# Altium PCB WS7.820.446.V01.PcbDoc
Units mm, origin at the board's own origin, x right, y up, seen from the top; angles counter-clockwise.
Board outline 102 x 24 mm, 4 copper layers (Top Layer, G2, S3, Bottom Layer); 62 components, 34 nets, 156 pads, 875 vias.
Unrouted connection lines stored in the file: 1595.
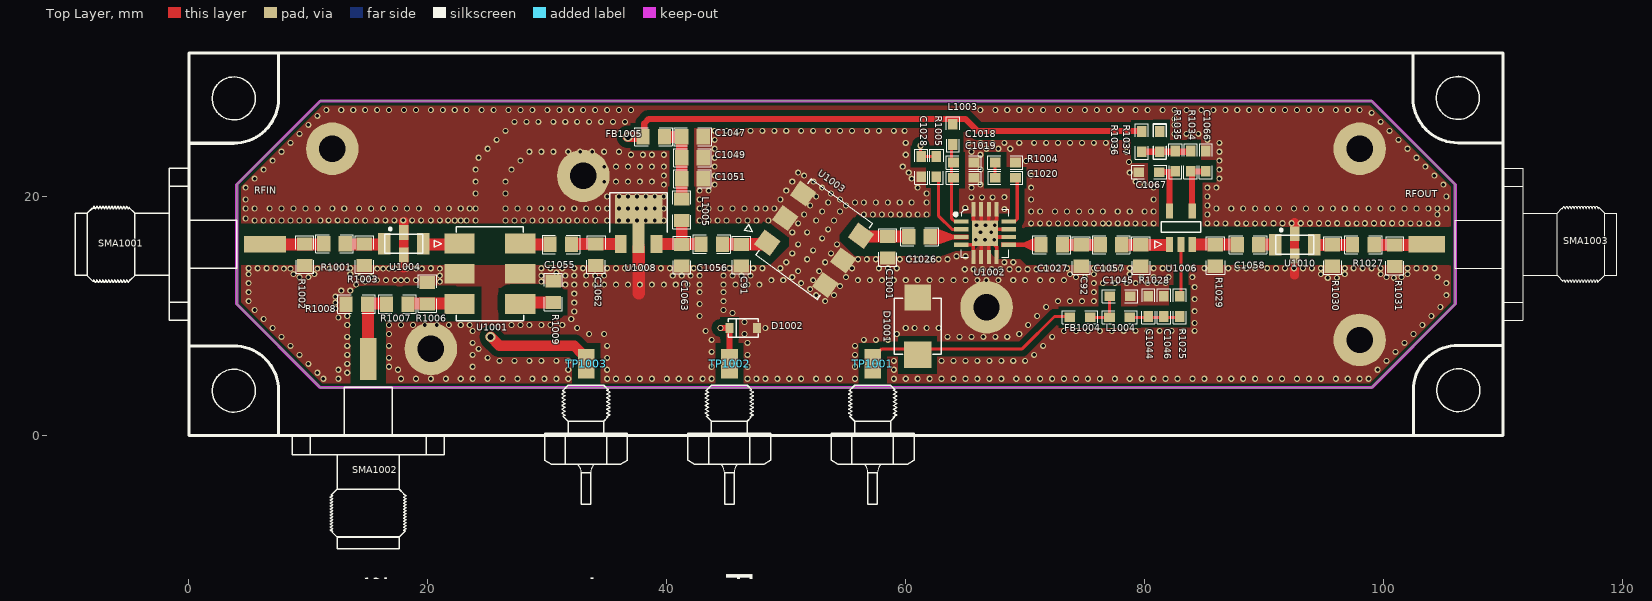
[diagram p0: Top Layer view]
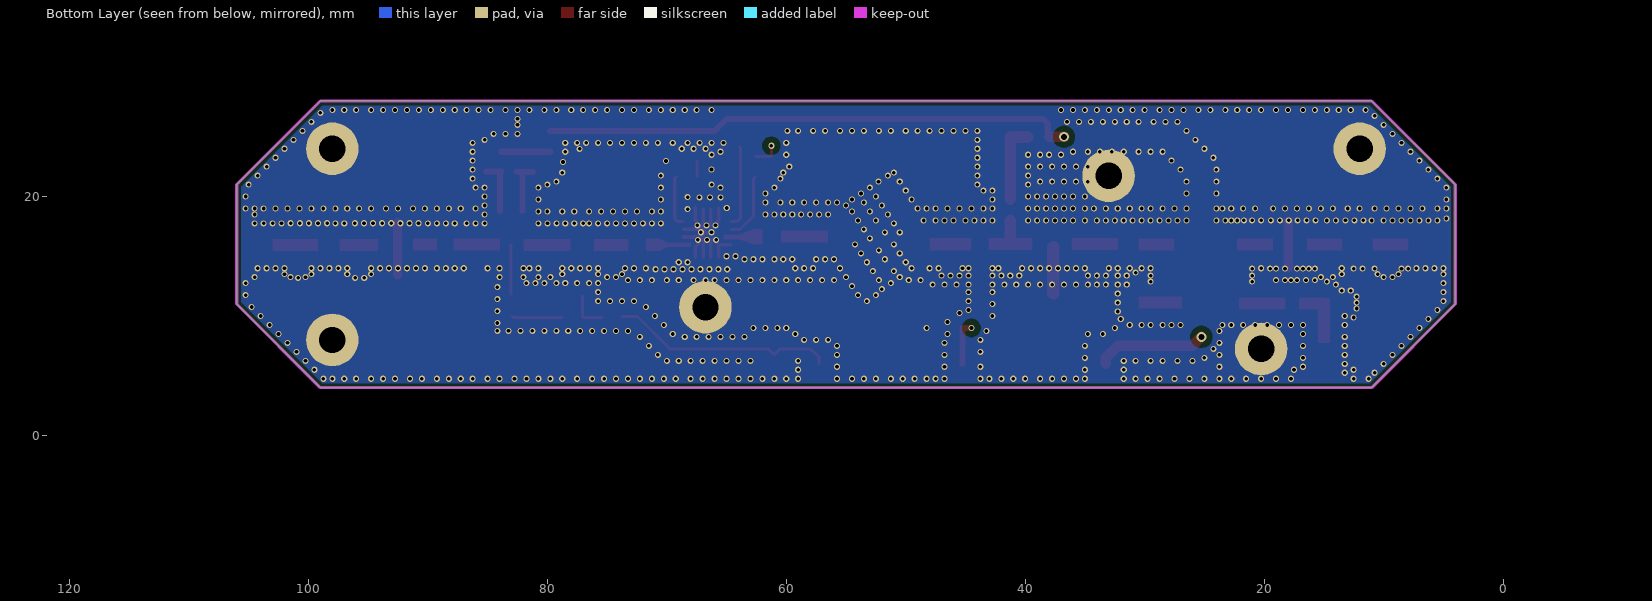
[diagram p1: Bottom Layer view, seen from below]
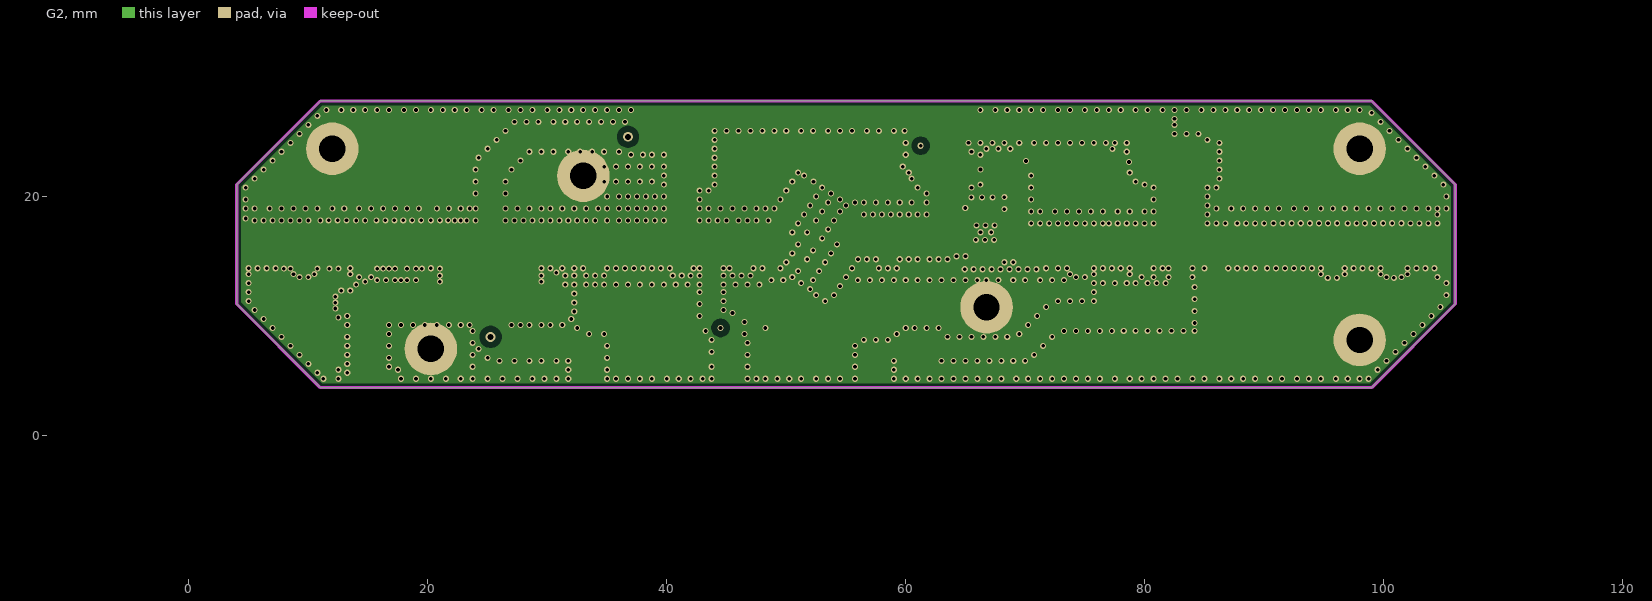
[diagram p2: G2]
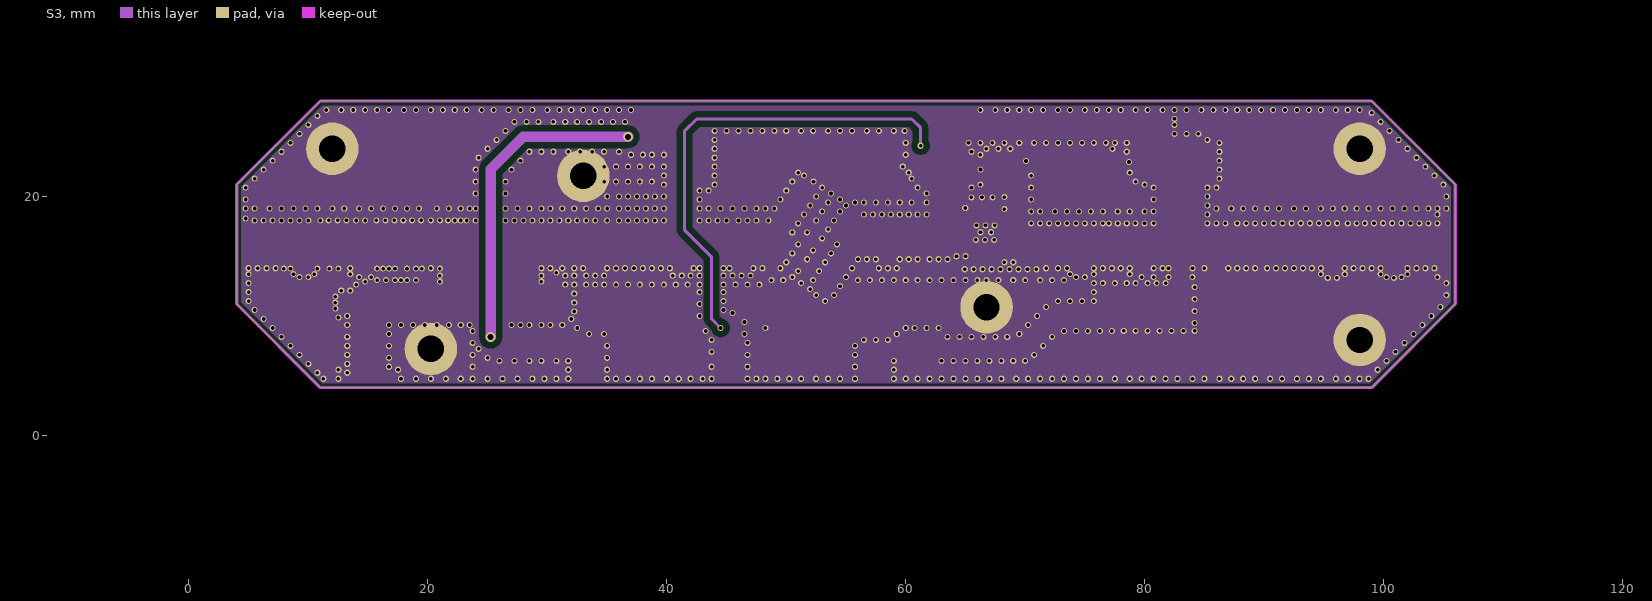
[diagram p3: S3]

## Layer stack, top to bottom
Top Solder: solder mask 0.0102, Solder Resist, Dk 3.5
Top Layer: signal copper 0.0356
Dielectric1: core 0.32, FR-4, Dk 4.8
G2: signal copper 0.0356
Dielectric3: prepreg 0.32, FR-4, Dk 4.8
S3: signal copper 0.0356
Dielectric2: core 0.32, FR-4, Dk 4.8
Bottom Layer: signal copper 0.0356
Bottom Solder: solder mask 0.0102, Solder Resist, Dk 3.5

## Board outline
4,11 11,4 99,4 106,11 106,21 99,28 11,28 4,21

## Design rules (kind name [scope] priority, off if disabled: settings)
Clearance Clearance_4 [(OnLayer('Keep-Out Layer'))] p1: gap=0.254 ignorepadtopadclearanceinfootprint=FALSE except(0: Arc-Hole Track-Hole SMDPad-Hole THPad-Hole Via-Hole Fill-Hole Poly-Hole Region-Hole Text-Hole)
Clearance Clearance_2 [IsFill or IsRegion vs (InPolygon)] p2: gap=1.016 ignorepadtopadclearanceinfootprint=FALSE except(0: Arc-Hole Track-Hole SMDPad-Hole THPad-Hole Via-Hole Fill-Hole Poly-Hole Region-Hole Text-Hole)
Clearance Clearance_1 [All vs (InPolygon)] p3: gap=0.508 ignorepadtopadclearanceinfootprint=FALSE except(0: Arc-Hole Track-Hole SMDPad-Hole THPad-Hole Via-Hole Fill-Hole Poly-Hole Region-Hole Text-Hole)
Clearance [All] p4: gap=0.152 ignorepadtopadclearanceinfootprint=FALSE except(0: Arc-Hole Track-Hole SMDPad-Hole THPad-Hole Via-Hole Fill-Hole Poly-Hole Region-Hole Text-Hole)
ComponentClearance [All] p1: gap=0 collisioncheckmode=3 verticalgap=0 showdistances=FALSE
DiffPairsRouting DP1DiffPairsRouting [InDifferentialPair ('D01') Or InDifferentialPair ('ADC_D1011') Or InDifferentialPair ('D1213') Or InDifferentialPair ('W5500_TX2') Or InDifferentialPair ('D67') Or InDifferentialPair ('ADC_D1213') Or InDifferentialPair ('D89') Or InDifferentialPair ('TX12') Or InDifferentialPair ('D1011') Or InDifferentialPair ('ADC_DCO') Or InDifferentialPair ('ADC_D89') Or InDifferentialPair ('D23') Or InDifferentialPair ('D45') Or InDifferentialPair ('ADC_D23') Or InDifferentialPair ('ADC_D67') Or InDifferentialPair ('ADC_D01') Or InDifferentialPair ('ADC_D45') Or InDifferentialPair ('W5500_RX2') Or InDifferentialPair ('RX') Or InDifferentialPair ('RX12') Or InDifferentialPair ('W5500_RX1') Or InDifferentialPair ('TX2') Or InDifferentialPair ('TX1') Or InDifferentialPair ('RX1') Or InDifferentialPair ('RX2') Or InDifferentialPair ('TX') Or InDifferentialPair ('W5500_TX1') Or InDifferentialPair ('DAC_IOUT') Or InDifferentialPair ('OUT') Or InDifferentialPair ('DCO') Or InDifferentialPair ('ADC_CLK') Or InDifferentialPair ('VIN')] p1: maxlimit=0.508 minlimit=0.216 mostfreqgap=0.216 toplayer_minwidth=0.191 toplayer_maxwidth=0.381 toplayer_prefwidth=0.191 midlayer1_minwidth=0.191 midlayer1_maxwidth=0.381 midlayer1_prefwidth=0.191 midlayer2_minwidth=0.191 midlayer2_maxwidth=0.381 midlayer2_prefwidth=0.191 bottomlayer_minwidth=0.191 bottomlayer_maxwidth=0.381 bottomlayer_prefwidth=0.191 maxuncoupledlength=12.7
HoleSize [All] p1: absolutevalues=TRUE maxlimit=10 minlimit=0.025 maxpercent=80.000 minpercent=20.000
HoleToHoleClearance [All] p1: gap=0 allowstackedmicrovias=TRUE
MatchedLengths DP1MatchedLengths [InDifferentialPair ('D01') Or InDifferentialPair ('ADC_D1011') Or InDifferentialPair ('D1213') Or InDifferentialPair ('W5500_TX2') Or InDifferentialPair ('D67') Or InDifferentialPair ('ADC_D1213') Or InDifferentialPair ('D89') Or InDifferentialPair ('TX12') Or InDifferentialPair ('D1011') Or InDifferentialPair ('ADC_DCO') Or InDifferentialPair ('ADC_D89') Or InDifferentialPair ('D23') Or InDifferentialPair ('D45') Or InDifferentialPair ('ADC_D23') Or InDifferentialPair ('ADC_D67') Or InDifferentialPair ('ADC_D01') Or InDifferentialPair ('ADC_D45') Or InDifferentialPair ('W5500_RX2') Or InDifferentialPair ('RX') Or InDifferentialPair ('RX12') Or InDifferentialPair ('W5500_RX1') Or InDifferentialPair ('TX2') Or InDifferentialPair ('TX1') Or InDifferentialPair ('RX1') Or InDifferentialPair ('RX2') Or InDifferentialPair ('TX') Or InDifferentialPair ('W5500_TX1') Or InDifferentialPair ('DAC_IOUT') Or InDifferentialPair ('OUT') Or InDifferentialPair ('DCO') Or InDifferentialPair ('ADC_CLK') Or InDifferentialPair ('VIN')] p1 off: tolerance=5.08 checknetsindiffpair=TRUE checkdiffpairvsdiffpair=FALSE checkxsignals=FALSE checkothers=FALSE
MinimumSolderMaskSliver [All] p1: minsoldermaskwidth=0
PlaneConnect [All] p1: planeconnectstyle=Direct reliefexpansion=0.508 reliefentries=4 reliefconductorwidth=0.508 reliefairgap=0.254
PolygonConnect [All] p1: connectstyle=Direct reliefconductorwidth=0.508 reliefentries=4 polygonreliefangle="45 Angle" airgapwidth=0.254
RoutingVias [All] p1: holewidth=0.305 width=0.508 viastyle="Through Hole" minholewidth=0.3 minwidth=0.508 maxholewidth=0.711 maxwidth=1.27
SilkToSilkClearance [All] p1: silktosilkclearance=0
SilkToSolderMaskClearance SilkscreenOverComponentPads [IsPad] p1: minsilkscreentomaskgap=0 clearancetoexposedcopper=TRUE
SolderMaskExpansion [All] p1: expansion=0 istentingtop=FALSE
Width DP1Width [InDifferentialPair('D01') Or InDifferentialPair('ADC_D1011') Or InDifferentialPair('D1213') Or InDifferentialPair('W5500_TX2') Or InDifferentialPair('D67') Or InDifferentialPair('ADC_D1213') Or InDifferentialPair('D89') Or InDifferentialPair('TX12') Or InDifferentialPair('D1011') Or InDifferentialPair('ADC_DCO') Or InDifferentialPair('ADC_D89') Or InDifferentialPair('D23') Or InDifferentialPair('D45') Or InDifferentialPair('ADC_D23') Or InDifferentialPair('ADC_D67') Or InDifferentialPair('ADC_D01') Or InDifferentialPair('ADC_D45') Or InDifferentialPair('W5500_RX2') Or InDifferentialPair('RX') Or InDifferentialPair('RX12') Or InDifferentialPair('W5500_RX1') Or InDifferentialPair('TX2') Or InDifferentialPair('TX1') Or InDifferentialPair('RX1') Or InDifferentialPair('RX2') Or InDifferentialPair('TX') Or InDifferentialPair('W5500_TX1') Or InDifferentialPair('DAC_IOUT') Or InDifferentialPair('OUT') Or InDifferentialPair('DCO') Or InDifferentialPair('ADC_CLK') Or InDifferentialPair('VIN')] p1: maxlimit=0.191 minlimit=0.191 preferedwidth=0.191
Width [All] p2: maxlimit=5.08 minlimit=0.191 preferedwidth=0.191
22 further rules are at their usual default settings.

## Components (designator, comment, footprint, x,y, rotation, side; value= is the part's Value field where it differs from the comment)
C91 "NC" C0805 46.25,15.1 r270 top
C92 "NC" C0805 74.688,15.061 r90 top
C1001 "NC" C0805 58.5,15.75 r270 top
C1018 "0.1uF" C0603#1 64.858,22.851 r0 top
C1019 "1nF" C0603#1 64.858,21.581 r180 top
C1020 "1nF" C0603#1 68.338,21.581 r180 top
C1026 "470pF" C0805 61.15,16.632 r0 top
C1027 "470pF" C0805 72.224,15.968 r0 top
C1028 "10pF" C0603#2 61.302,22.505 r270 top
C1044 "100pF" C0603#2 80.299,10.813 r90 top
C1045 "1nF" C0603#2 77.938,11.663 r0 top
C1046 "47nF" C0603#1 81.614,10.813 r270 top
C1047 "10uF/10V" C0805 42.15,25 r180 top
C1049 "0.1uF" C0805 42.15,23.25 r180 top
C1051 "15pF" C0805 42.15,21.5 r180 top
C1055 "470pF" C0805 31.134,15.993 r0 top
C1056 "470pF" C0805 43.75,16.025 r0 top
C1057 "470pF" C0805 77.188,15.961 r0 top
C1058 "470pF" C0805 88.653,15.961 r0 top
C1062 "NC" C0805 34.068,15.141 r90 top
C1063 "NC" C0805 41.25,15.1 r90 top
C1066 "47nF" C0603#1 85.112,22.962 r270 top
C1067 "47nF" C0603#1 80.365,22.052 r0 top
D1001 "SMBJ24CA" DO-214AA 61,9.15 r270 top
D1002 "ESD5V0D3B" SOD-323 46.4,9 r0 top
FB1004 "FB_0603" L0603 74.588,9.894 r0 top
FB1005 "FB_0805" L0805 38.9,25 r0 top
L1003 "FB_0603" L0603 63.938,25.211 r90 top
L1004 "10nH" L0603 77.905,9.894 r0 top
L1005 "22nH" L0805 41.25,18.9 r270 top
R1001 "5.1Ω" R0805 12.188,16.038 r0 top
R1002 "1KΩ" R0805 9.688,15.138 r90 top
R1003 "1KΩ" R0805 14.688,15.138 r90 top
R1004 "51Ω" R0603 68.338,22.851 r0 top
R1005 "30Ω" R0603 62.572,22.505 r270 top
R1006 "1KΩ" R0805 19.938,11.898 r270 top
R1007 "5.1Ω" R0805 17.438,10.998 r180 top
R1008 "1KΩ" R0805 14.038,10.998 r0 top
R1009 "51Ω" R0805 30.5,12.025 r90 top
R1025 "1K" R0603 82.938,10.813 r270 top
R1027 "5.1Ω" R0805 98.313,15.954 r0 top
R1028 "910Ω" R0805 79.688,15.061 r90 top
R1029 "910Ω" R0805 85.925,15.066 r90 top
R1030 "1KΩ" R0805 95.71,15.065 r90 top
R1031 "1KΩ" R0805 100.944,15.04 r90 top
R1034 "2K" R0603 83.842,22.962 r90 top
R1035 "2K" R0603 82.572,22.962 r270 top
R1036 "1K" R0603 79.75,24.6 r270 top
R1037 "1K" R0603 81.25,24.6 r270 top
SMA1001 "SMA-50KFD-4" SMA-50KFD-4#1 6.375,16.062 r180 top
SMA1002 "SMA-50KFD-4" SMA-50KFD-4#1 14.94,6.4 r270 top
SMA1003 "SMA-50KFD-4" SMA-50KFD-4#2 103.625,15.938 r0 top
TP1001 "TEST" FC-M4 57.25,6 r270 top
TP1002 "TEST" FC-M4 45.25,6 r270 top
TP1003 "TEST" FC-M4 33.25,6 r270 top
U1001 "ADC-6-13+" 6SM-2R54-7R87X5R59 25.188,13.538 r270 top
U1002 "RFSW6024" QFN16_0R65_4X4-1 66.636,16.933 r0 top
U1003 "RLM-63-2W+" 6SM-2R54-7R87X6R35 52.335,16.424 r54 top
U1004 "LFCN-400+" LFCN-3216 17.982,16.051 r0 top
U1006 "BAP70Q" SOT23-5 83.029,17.393 r0 top
U1008 "PHA-1+" SOT-89 37.643,17.475 r0 top
U1010 "LFCN-400+" LFCN-3216 92.558,15.954 r0 top

## Footprints (in the part's own frame and the unit in brackets; to place one, negate y for a bottom-side part, rotate by r counter-clockwise, add the part's x,y. Pads: shape width x height; smd on the part's side, far side on the other; paste and mask are expansions set on the pad)
6SM-2R54-7R87X5R59 [mm]
  rect 1.65x2.54 smd: 1(-2.54,-2.54) 2(0,-2.54) 3(2.54,-2.54) 4(2.54,2.54) 5(0,2.54) 6(-2.54,2.54)
  silkscreen extent -3.93,-4.66 3.93,2.82
6SM-2R54-7R87X6R35 [mm]
  rect 1.52x1.65 smd: 1(-2.54,3) 2(0,3) 3(2.54,3) 4(2.54,-3) 5(0,-3) 6(-2.54,-3)
  silkscreen extent -3.93,-3.18 3.93,5.16
C0603#1 [mm]
  rect 0.9x0.8 smd: 1(-0.85,0) 2(0.85,0)
  silkscreen extent -1.47,-0.55 1.47,0.55
C0603#2 [mm]
  rect 0.9x0.8 smd: 1(0.85,0) 2(-0.85,0)
  silkscreen extent -1.47,-0.55 1.47,0.55
C0805 [mm]
  rect 1.1x1.3 smd: 1(-0.9,0) 2(0.9,0)
  silkscreen extent -1.57,-0.76 1.57,0.76
DO-214AA [mm]
  rect 2.2x2.2 smd: 1(-2.4,0)
  rect 2.2x2.3 smd: 2(2.4,0)
  silkscreen extent -2.35,-1.97 2.35,1.97
FC-M4 [mm] "一对"
  rect 2.5x1.4 smd: 1(0,0)
  silkscreen extent 1.8,-3.48 11.77,3.44
L0603 [mm]
  rect 0.9x0.8 smd: 1(0.85,0) 2(-0.85,0)
  silkscreen extent -1.47,-0.55 1.47,0.55
L0805 [mm]
  rect 1.1x1.3 smd: 1(-0.9,0) 2(0.9,0)
  silkscreen extent -1.57,-0.76 1.57,0.76
LFCN-3216 [mm]
  rect 1.04x1.8 smd mask+0.05: 1(-1.625,0) 3(1.625,0)
  rect 0.81x1.25 smd mask+0.05: 2(0,-0.93) 4(0,0.93)
  silkscreen extent -1.6,-0.8 1.6,1.34
QFN16_0R65_4X4-1 [mm]
  rect 1.2x0.35 smd: 1(-2,0.975) 2(-2,0.325) 3(-2,-0.325) 4(-2,-0.975) 9(2,-0.975) 10(2,-0.325) 11(2,0.325) 12(2,0.975)
  rect 0.35x1.2 smd: 5(-0.975,-2) 6(-0.325,-2) 7(0.325,-2) 8(0.975,-2) 13(0.975,2) 14(0.325,2) 15(-0.325,2) 16(-0.975,2)
  rect 2.15x2.15 smd: 17(0,0)
  silkscreen extent -2.58,-2 2,2
R0603 [mm]
  rect 0.9x0.8 smd: 1(-0.85,0) 2(0.85,0)
  silkscreen extent -1.47,-0.55 1.47,0.55
R0805 [mm]
  rect 1.1x1.3 smd: 1(-0.9,0) 2(0.9,0)
  silkscreen extent -1.57,-0.76 1.57,0.76
SMA-50KFD-4#1 [mm] "SMA-JB3C"
  rect 3.5x1.4 smd: 1(0,0.06)
  silkscreen extent 2.37,-6.29 15.9,6.41
SMA-50KFD-4#2 [mm] "SMA-JB3C"
  rect 3.048x1.4 smd: 1(0,0.06)
  silkscreen extent 2.37,-6.29 15.9,6.41
SOD-323 [mm]
  rect 0.65x0.85 smd: 1(-1.15,0) 2(1.15,0)
  silkscreen extent -1.25,-0.76 1.27,0.76
SOT23-5 [mm]
  rect 0.6x1.27 smd: 1(-0.95,-1.4) 2(0,-1.4) 3(0.95,-1.4) 4(0.95,1.4) 5(-0.95,1.4)
  silkscreen extent -2.2,-1.7 1.65,0.5
SOT-89 [mm]
  rect 1x1.5 smd: 1(-1.5,-1.45) 3(1.5,-1.45)
  rect 1x4 smd: 2(0,-0.2)
  rect 4x2.4 smd: 4(0,1.45)
  silkscreen extent -2.4,-0.45 2.4,2.85

## Part data
C91 C92 C1001 C1026 C1027: library part 10pF贴片电容, "贴片电容_GRM215C1H100JA01D_10pF±5%,50V,0805", code=01010097
C1018: library part 0.1uF贴片电容, "贴片电容_GRM188R71H104KA01D_0.1uF±10%,50V,0603", code=01010045
C1019 C1020: library part 1000pF贴片电容, "贴片电容_GRM188R71H102KA01_1000pF±10%,50V,0603", code=01010093
C1028: library part 10pF贴片电容, "贴片电容_0603CG100J500NT_10pF±5%,50V,0603", code=01010001
C1044 C1045: library part 100pF贴片电容, "贴片电容_GRM185C1H101K_100pF±10%,50V,0603"
C1046 C1066 C1067: library part 47nF贴片电容, "贴片电容_GRM1885C1H473KA01D_47nF±10 %,50V,0603", code=01010080
C1047: library part 10uF贴片电容, "贴片电容_GRM21BR61A106KE19L_10uF±10%,10V,0805", code=01010036
C1049: library part 100nF贴片电容, "贴片电容_GRM21BR71E104KA01L_100nF±10%,25V,0805", code=03030016
C1051: library part 15pF贴片电容, "贴片电容_GRM2165C1H150JA01D_15pF±5%,50V,0805", code=01010024
C1055: library part 1pF贴片电容, "贴片电容_GRM2165C1H1R0CA01D_1pF±0.25F,50V,0805"
C1056: library part 3pF贴片电容, "贴片电容_GRM2165C1H3R0DD47D_3pF±0.5pF%,50V,0805"
C1057 C1058: library part 100pF贴片电容, "贴片电容_GRM2165C1H101JA01D_100pF±5%,50V,0805"
C1062 C1063: library part DLC_0.5pF, "普通电容"
D1001: library part SMBJ12CA, "TVS_SMBJ24CA_SMB封装"
D1002: library part ESD5B5.0ST1G, "ESD_ESD5V0D3B_SOD-323,5V,双管"
FB1004: library part 0603贴片磁珠, "贴片磁珠_100R,0603", code=0103016
FB1005: library part 0805贴片磁珠, "贴片磁珠_600R,0805", code=01030023
L1003: library part 0805贴片磁珠
L1004: library part 3.3nH贴片电感, "贴片电感_3.3nH,0603"
L1005: library part 22nH贴片电感, "贴片电感_22nH,0805", code=01030016
R1001 R1007 R1027: library part 18Ω贴片电阻, "贴片电阻_0805,5.1Ω,±1％", code=1.02.01.131
R1002 R1003 R1006 R1008 R1030 R1031: library part 300Ω贴片电阻, "贴片电阻_0805,1KΩ,±5％", code=1.02.01.108
R1004: library part 51Ω贴片电阻, "贴片电阻_51Ω±5%,0603", code=01020009
R1005: library part 30Ω贴片电阻, "贴片电阻_30Ω±5%,0603", code=01020108
R1009: library part 51Ω贴片电阻, "贴片电阻_51Ω±5%,0805", code=01020023
R1025 R1036 R1037: library part 1K贴片电阻, "贴片电阻_1K±5%,0603", code=01020082
R1028 R1029: library part 910Ω贴片电阻, "贴片电阻_910Ω±5%,0805", code=01020061
R1034 R1035: library part 2K贴片电阻, "贴片电阻_2K±5%,0603", code=01020086
SMA1001 SMA1002 SMA1003: "射频同轴连接器_SMA-50KFD-4", code=03100009
TP1001 TP1002 TP1003: library part TP1mm, "表贴测试点1mm"
U1001: library part ADC-6-1R+, "50Ω,5 to200MHz"
U1002: library part RFSW6124, maker=RFMD
U1003: "50Ω,30 to6000MHz"
U1004 U1010: library part LFCN-2500+, "滤波器_LFCN-2500+_DC~2500MHz,3216", code=0306016
U1006: "二极管衰减器_BAP70Q_300kHz ~4GHz,SOT753", code=03020009, maker=NXP
U1008: "功率放大管_PHA-1+_0.05-6GHz,SOT89", code=01060123, maker=Minicircuits

## Free pads (board coordinates)
  round 4.4 hole 2.2: ""(12,24) ""(20.25,7.25) ""(33.015,21.736) ""(66.765,10.736) ""(98,8) ""(98,24)

## Via types
v1: diameter 0.508, hole 0.305, Top Layer to Bottom Layer, tented both sides, 803 vias
v2: diameter 0.508, hole 0.3, Top Layer to Bottom Layer, tented both sides, 70 vias
v3: diameter 0.813, hole 0.508, Top Layer to Bottom Layer, tented both sides, 2 vias

## Nets (pads, with @x,y where several pads share a name; then routed paths per layer and width w, separated by ;. In a path a pad name is that pad's centre, name@x,y a point inside that pad or via, vN(x,y) a via of type N, cw(c..) or ccw(c..) an arc to the next point about the centre after c; other vN are vias at no path point)
+5V_1: FB1005.1 L1003.1 R1036.1 TP1003.1 | length 80.3
  Top Layer w0.508: FB1005.1@38,25.25 38.114,25.364 38.114,26.114 38.5,26.5 65,26.5 66,25.5 R1036.1@79.787,25.5
  Top Layer w0.889: v3(25.25,8.25) 26,7.5 32.245,7.5 32.939,6.806 32.995,6.806 33.25,6.55 TP1003.1 ; v3(36.75,25) FB1005.1
  S3 w0.889: v3(25.25,8.25) 25.25,22.273 27.977,25 v3(36.75,25)
BAP70Q_Vctrl_1: D1001.2 FB1004.2 TP1001.1 | length 18.9
  Top Layer w0.254: TP1001.1 57.25,6.55 57.823,7.123 57.873,7.123 58,7.25 60.5,7.25 D1001.2 61.5,7.25 69.75,7.25 72.461,9.961 FB1004.2@73.738,9.961
GND: C91.2 C92.1 C1001.2 C1018.2 C1019.1 C1028.1 C1044.1 C1045.1 C1046.1 C1047.1 C1049.1 C1051.1 C1062.1 C1063.1 C1066.1 C1067.1 D1001.1 D1002.2 pad. R1002.1 R1003.1 R1004.2 R1006.1 R1008.1 R1009.2 R1028.1 R1029.1 R1030.1 R1031.1 U1001.2 U1001.5 U1002.4 U1002.5 U1002.6 U1002.7 U1002.8 U1002.10 U1002.11 U1002.13 U1002.14 U1002.15 U1002.16 U1002.17 U1003.2 U1003.3 U1003.5 U1003.6 U1004.2 U1004.4 U1008.2 U1008.4 U1010.2 U1010.4 | length 31.2
  Top Layer w0.191: v1(75,17.75) 75.098,17.848 v1@75.048,17.898
  Top Layer w0.305: U1002.4 U1002.17@65.661,15.958 ; U1002.5 U1002.17@65.661,15.958 ; U1002.16@65.661,19.021 65.661,18.034 65.714,17.982 65.714,17.856 65.722,17.848 U1002.17@65.791,17.848 ; v1(65.874,16.374) U1002.17@65.874,16.171 ; U1002.6 U1002.17@66.311,16.324 ; U1002.17@66.311,17.543 U1002.15 ; U1002.17 U1002.17@66.961,17.258 ; U1002.7 U1002.17@66.961,16.374 ; U1002.14 U1002.17@66.961,17.258 ; U1002.17@67.246,16.608 U1002.10 ; U1002.17@67.246,17.258 U1002.11 ; U1002.17@67.315,16.07 67.611,15.774 U1002.8 ; v1(67.398,16.374) U1002.17@66.961,16.374 ; U1002.13@67.611,19.119 67.611,18.034 67.559,17.982 67.559,17.856 U1002.17@66.961,17.258 ; U1002.17@65.661,15.958 U1002.17@65.874,16.171 ; U1002.17@65.874,16.171 66.077,16.374 v1(66.636,16.374) U1002.17@66.961,16.374 ; U1002.17@66.961,16.374 U1002.17@66.961,17.258
  Top Layer w0.762: 17.982,14.019 U1004.2 U1004.4 v2@17.982,17.908 ; U1010.2@92.534,15 U1010.2 ; 92.558,13.442 U1010.2 ; 92.558,17.812 U1010.4 U1010.2
  Top Layer w1.016: 37.651,11.901 U1008.2@37.651,15.783
  other v1: 11.25,4.75 12.5,4.75 17.75,4.75 19,4.75 20.25,4.75 21.5,4.75 22.75,4.75 23.75,4.75 25,4.75 26.25,4.75 27.5,4.75 28.75,4.75 29.75,4.75 30.75,4.75 31.75,4.75 35,4.75 35.75,4.75 36.75,4.75 37.75,4.75 38.75,4.75 40,4.75 41,4.75 42,4.75 43,4.75 43.75,4.75 46.75,4.75 47.5,4.75 48.25,4.75 49.25,4.75 50.25,4.75 51.25,4.75 52.5,4.75 53.5,4.75 54.5,4.75 55.75,4.75 59,4.75 60,4.75 61,4.75 62,4.75 63,4.75 64,4.75 65,4.75 66,4.75 67,4.75 68,4.75 69.25,4.75 70.25,4.75 71.25,4.75 72.25,4.75 73.25,4.75 74.25,4.75 75.25,4.75 76.25,4.75 77.5,4.75 78.75,4.75 79.75,4.75 80.75,4.75 81.75,4.75 82.75,4.75 84,4.75 85,4.75 86.25,4.75 87.25,4.75 88.25,4.75 89.25,4.75 90.5,4.75 91.5,4.75 92.75,4.75 93.75,4.75 94.75,4.75 96,4.75 97,4.75 98,4.75 98.75,4.75 10.75,5.25 13.25,5.25 12.5,5.5 17.5,5.5 31.75,5.5 35,5.5 59,5.5 99.5,5.5 16.75,5.75 23.75,5.75 43.75,5.75 46.75,5.75 55.75,5.75 10,6 13.25,6 26,6.25 27.25,6.25 28.5,6.25 29.5,6.25 30.75,6.25 31.75,6.25 59,6.25 63,6.25 64,6.25 65,6.25 66,6.25 67,6.25 68,6.25 69,6.25 70,6.25 100.25,6.25 16.75,6.5 25,6.5 35,6.5 9.25,6.75 13.25,6.75 23.75,6.75 46.75,6.75 55.75,6.75 70.75,6.75 43.75,7 101,7 24.25,7.25 8.5,7.5 13.25,7.5 16.75,7.5 35,7.5 55.75,7.5 71.5,7.5 23.75,7.75 46.75,7.75 101.75,7.75 43.75,8 56.5,8 57.5,8 58.5,8 7.75,8.25 13.25,8.25 63.5,8.25 64.5,8.25 65.5,8.25 66.5,8.25 67.5,8.25 68.5,8.25 72.25,8.25 16.75,8.5 33.5,8.5 34.75,8.5 46.5,8.5 59.25,8.5 69.5,8.5 102.5,8.5 23.75,8.75 43.25,8.75 73.25,8.75 74.25,8.75 75.25,8.75 76.25,8.75 77.25,8.75 7,9 32.5,9 48.25,9 60,9 60.75,9 61.75,9 62.75,9 13.25,9.25 16.75,9.25 17.75,9.25 18.75,9.25 19.75,9.25 20.75,9.25 21.75,9.25 22.75,9.25 23.5,9.25 27,9.25 27.75,9.25 28.5,9.25 29.5,9.25 30.25,9.25 31.25,9.25 70.25,9.25 103.25,9.25 46.5,9.5 6.25,9.75 32,9.75 12.5,9.875 13.25,10 42.75,10 71,10 104,10 45.5,10.25 32.25,10.375 5.5,10.5 44.75,10.5 12.25,10.625 71.75,10.75 104.75,10.75 42.75,11 12.25,11.125 32.25,11.125 5,11.25 44.75,11.25 53.25,11.25 72.75,11.25 73.75,11.25 74.75,11.25 75.75,11.25 12.25,11.625 52.5,11.75 54,11.75 105.25,11.75 32.25,11.875 5,12 42.75,12 44.75,12 75.75,12 12.75,12.125 13.5,12.125 52,12.25 54.5,12.5 14,12.625 31.5,12.625 32.25,12.625 33.25,12.625 34,12.625 34.75,12.625 35.75,12.625 39.75,12.625 40.75,12.625 41.75,12.625 42.75,12.625 44.75,12.625 45.75,12.625 46.75,12.625 47.75,12.625 5,12.75 51.25,12.75 75.75,12.75 105.25,12.75 14.75,12.875 21,12.875 29.5,12.875 15.75,13 16.5,13 17.25,13 17.75,13 18.25,13 19,13 48.75,13 49.75,13 52.25,13 59,13 60,13 61,13 62,13 63,13 64,13 95.325,13.199 96.087,13.199 100.858,13.199 9.25,13.25 10,13.25 14.25,13.25 15.25,13.25 50.5,13.25 55,13.25 75,13.25 79.75,13.25 80.75,13.25 100.25,13.25 101.5,13.25 104.5,13.25 21,13.375 29.5,13.375 31.5,13.375 32.25,13.375 34.75,13.375 40.5,13.375 41.25,13.375 42,13.375 42.75,13.375 44.75,13.375 45.5,13.375 46.25,13.375 47,13.375 5,13.5 8.75,13.5 10.5,13.5 13.5,13.5 73.75,13.5 78.75,13.5 94.75,13.5 96.75,13.5 99.75,13.5 102,13.5 30.75,13.625 51,13.75 52.75,13.75 64.938,13.913 65.688,13.913 66.438,13.913 67.188,13.913 67.938,13.913 68.688,13.913 69.438,13.913 70.188,13.913 70.938,13.913 10.75,13.963 11.75,13.963 12.5,13.963 15.75,13.963 16.25,13.963 16.75,13.963 17.25,13.963 18.25,13.963 19,13.963 19.5,13.963 21,13.963 13.5,14 20.25,14 29.5,14 30.25,14 31.25,14 32.25,14 36.5,14 37.25,14 38,14 38.75,14 39.5,14 40.25,14 42.25,14 42.75,14 44.75,14 45.25,14 47.25,14 48,14 49.5,14 55.5,14 57.75,14 58.5,14 59.25,14 71.75,14 72.75,14 73.5,14 76.5,14 77.25,14 78,14 78.75,14 80.75,14 81.5,14 82,14 84,14 85,14 87,14 87.75,14 88.5,14 89.25,14 90.25,14 91,14 91.75,14 92.5,14 93.25,14 94,14 94.75,14 96.75,14 97.5,14 98.25,14 99,14 99.75,14 102,14 102.75,14 103.5,14 104.25,14 50,14.5 53.25,14.5 51.75,14.75 56,14.75 56.75,14.75 57.5,14.75 59.5,14.75 60.25,14.75 61,14.75 62,14.75 62.75,14.75 63.5,14.75 64.25,15 65,15 50.5,15.25 53.75,15.25 52.25,15.5 51,16 54.25,16 53,16.5 50.5,17 51.75,17 66.255,17.009 67.144,17.009 53.5,17.25 65.918,17.594 66.68,17.594 67.442,17.594 51,17.75 70.5,17.75 71.25,17.75 72,17.75 72.75,17.75 73.5,17.75 74.25,17.75 75.75,17.75 77,17.75 77.75,17.75 78.5,17.75 79.226,17.75 79.988,17.75 80.75,17.75 85.25,17.75 86,17.75 86.75,17.75 87.75,17.75 88.5,17.75 89.25,17.75 90,17.75 90.78,17.762 91.542,17.762 92.304,17.762 93.066,17.762 93.828,17.762 94.59,17.762 95.352,17.762 96.114,17.762 98.437,17.762 99.198,17.762 99.96,17.762 100.722,17.762 101.484,17.762 102.25,17.75 103,17.75 103.75,17.75 104.5,17.75 5.5,18 6.25,18 7,18 7.75,18 8.5,18 9.25,18 10,18 11,18 14,18 14.75,18 22.25,18 22.75,18 23.25,18 24,18 26.5,18 27.25,18 28,18 28.75,18 29.5,18 30.25,18 31,18 31.75,18 32.5,18 33.25,18 34,18 35,18 36,18 36.75,18 37.5,18 38.25,18 39,18 39.75,18 42.75,18 43.5,18 44.25,18 45,18 46,18 46.75,18 47.5,18 48.5,18 52.5,18 54,18 4.75,18.163 51.5,18.5 56.5,18.5 57.25,18.5 58,18.5 58.75,18.5 59.5,18.5 60.25,18.5 61,18.5 61.75,18.5 85.25,18.5 104.5,18.5 53,18.75 54.5,18.75 70.5,18.75 71.25,18.75 72.5,18.75 73.5,18.75 74.5,18.75 75.5,18.75 76.5,18.75 77.75,18.75 78.75,18.75 80,18.75 80.75,18.75 68.256,18.94 4.75,19 5.5,19 6.75,19 7.75,19 8.75,19 9.75,19 10.75,19 12,19 13,19 14.25,19 15.25,19 16.25,19 17.25,19 18.25,19 19.25,19 20.75,19 21.75,19 22.75,19 23.5,19 24,19 26.5,19 27.5,19 28.5,19 29.5,19 30.25,19 31.25,19 33.25,19 34.25,19 35,19 36,19 36.75,19 37.5,19 38.25,19 39,19 39.75,19 42.75,19 43.5,19 44.5,19 45.5,19 46.5,19 47.5,19 48.25,19 49,19 86,19 87.25,19 88.25,19 89.25,19 90.25,19 91.25,19 92.5,19 93.5,19 94.75,19 95.75,19 96.75,19 97.75,19 98.75,19 99.75,19 100.75,19 101.75,19 102.75,19 103.75,19 104.5,19 105.25,19 64.985,19.041 52,19.25 55,19.25 85.25,19.25 53.5,19.5 55.75,19.5 56.5,19.5 57.5,19.5 58.5,19.5 59.5,19.5 60.5,19.5 61.75,19.5 4.75,19.75 42.75,19.75 49.5,19.75 54.5,19.75 70.5,19.75 80.75,19.75 65.493,19.93 66.382,19.93 67.271,19.93 68.256,19.956 35,20 36,20 36.75,20 37.5,20 38.25,20 39,20 39.75,20 52.5,20 85.25,20 105.25,20 24,20.25 26.5,20.25 53.75,20.25 61.75,20.25 42.75,20.5 43.5,20.5 50,20.5 4.75,20.75 53,20.75 61,20.75 65.5,20.75 70.5,20.75 80.75,20.75 85.25,20.75 86,20.75 39.75,21 44,21 66.25,21 80,21 105,21 24,21.25 26.5,21.25 34.75,21.25 35.75,21.25 36.75,21.25 37.75,21.25 38.75,21.25 50.5,21.25 52.284,21.253 79.25,21.25 5.5,21.5 60.5,21.5 39.75,21.75 44,21.75 51.5,21.75 70.5,21.75 104.25,21.75 51,22 60.25,22 78.75,22 6.25,22.25 24,22.25 27,22.25 66.255,22.258 34.75,22.5 35.75,22.5 36.75,22.5 37.75,22.5 38.75,22.5 39.75,22.5 44,22.5 59.75,22.5 103.5,22.5 78.692,22.894 70.065,22.978 7,23 27.75,23 24.25,23.25 44,23.25 102.75,23.25 37,23.5 38,23.5 38.75,23.5 39.75,23.5 60,23.5 66.25,23.5 7.75,23.75 28.5,23.75 29.5,23.75 30.5,23.75 31.75,23.75 32.75,23.75 33.75,23.75 34.75,23.75 36,23.75 65.5,23.75 78.5,23.75 86.25,23.75 25,24 44,24 66.75,24 67.75,24 68.75,24 77.295,23.994 102,24 8.5,24.5 60,24.5 65.25,24.5 66.25,24.5 67.25,24.5 68.25,24.5 69.5,24.5 70.75,24.5 71.75,24.5 72.75,24.5 73.75,24.5 74.75,24.5 75.75,24.5 76.75,24.5 77.5,24.5 78.5,24.5 86.25,24.5 25.75,24.75 44,24.75 85.25,24.75 101.25,24.75 9.25,25.25 82.5,25.25 83.5,25.25 84.5,25.25 26.5,25.5 44,25.5 45,25.5 46,25.5 47,25.5 48,25.5 49,25.5 50,25.5 51.25,25.5 52.25,25.5 53.5,25.5 54.5,25.5 55.5,25.5 56.75,25.5 57.75,25.5 59,25.5 59.905,25.5 100.5,25.5 10,26 82.5,26 27.25,26.25 28.25,26.25 29.25,26.25 30.5,26.25 31.5,26.25 32.5,26.25 33.5,26.25 34.5,26.25 35.5,26.25 36.5,26.25 99.75,26.25 82.5,26.5 10.75,26.75 99,27 11.5,27.25 12.75,27.25 13.75,27.25 14.75,27.25 15.75,27.25 16.75,27.25 18,27.25 19,27.25 20.25,27.25 21.25,27.25 22.25,27.25 23.25,27.25 24.5,27.25 25.5,27.25 26.75,27.25 27.75,27.25 28.75,27.25 30,27.25 31,27.25 32,27.25 33,27.25 34,27.25 35,27.25 36,27.25 37,27.25 66.25,27.25 67.5,27.25 68.5,27.25 69.5,27.25 70.5,27.25 71.5,27.25 72.75,27.25 73.75,27.25 75,27.25 76,27.25 77,27.25 78,27.25 79.25,27.25 80.25,27.25 81.5,27.25 82.5,27.25 83.5,27.25 84.75,27.25 85.75,27.25 86.75,27.25 87.75,27.25 88.75,27.25 89.75,27.25 90.75,27.25 91.75,27.25 92.75,27.25 93.75,27.25 94.75,27.25 96,27.25 97,27.25 98,27.25
  other v2: 78.25,8.75 79.25,8.75 80.25,8.75 81.25,8.75 82.25,8.75 83.25,8.75 84.188,8.75 84.188,9.413 84.188,10.413 84.188,11.413 84.188,12.413 36.75,12.625 37.75,12.625 38.75,12.625 76.5,12.75 77.5,12.75 78.5,12.75 79.25,12.75 80.25,12.75 81,12.75 81.75,12.75 56,13 57,13 58,13 65,13 66,13 66.75,13 67.75,13 69,13 70,13 71.25,13 72.25,13 73.25,13 74.25,13.25 82,13.25 84,13.25 33.25,13.375 34,13.375 75.75,13.5 7.938,13.963 8.5,13.963 5,14 5.75,14 6.5,14 7.25,14 33,14 35,14 35.75,14 75.75,14 68.25,14.5 69,14.5 76.5,17.75 97,17.75 97.75,17.75 11.688,18 12.438,18 13.188,18 15.688,18 16.438,18 17.188,18 17.938,18 18.688,18 19.438,18 20.25,18 21,18 21.688,18 32.25,19 86.25,21.5 86.25,22.25 86.25,23
NetC91_1: C91.1 C1056.2 U1003.1
NetC92_2: C92.2 C1027.2 C1057.1
NetC1001_1: C1001.1 C1026.1 U1003.4
NetC1018_1: C1018.1 C1019.2 L1003.2 U1002.1 | length 8.1
  Top Layer w0.254: 63.847,20.422 63.847,19.27 ; L1003.2@63.935,24.16 63.847,24.073 63.847,19.27 ; U1002.1 64.086,17.908 63.847,18.147 63.847,19.27
NetC1020_1: C1020.1 U1002.12 | length 4.4
  Top Layer w0.254: U1002.12 69.129,17.908 69.334,18.113 69.334,21.536 C1020.1@69.188,21.683
NetC1020_2: C1020.2 R1004.1 | length 1.3
  Top Layer w0.254: C1020.2@67.488,21.683 R1004.1@67.488,22.953
NetC1026_2: C1026.2 U1002.3
NetC1027_1: C1027.1 U1002.9
NetC1044_2: C1044.2 C1046.2 L1004.1 R1025.2 | length 4.2
  Top Layer w0.254: L1004.1 82.868,9.894 R1025.2
NetC1045_2: C1045.2 FB1004.1 L1004.2 | length 3.4
  Top Layer w0.254: FB1004.1 L1004.2 77.055,11.63 C1045.2
NetC1047_2: C1047.2 C1049.2 C1051.2 FB1005.2 L1005.1 | length 6.7
  Top Layer w1: FB1005.2 C1047.2 C1049.2 C1051.2 L1005.1
NetC1055_1: C1055.1 U1001.6
NetC1055_2: C1055.2 C1062.2 U1008.1
NetC1056_1: C1056.1 C1063.2 L1005.2 U1008.3 | length 1.5
  Top Layer w1: C1063.2@41.25,16.5 L1005.2
NetC1057_2: C1057.2 R1028.2 U1006.1
NetC1058_1: C1058.1 R1029.2 U1006.3
NetC1058_2: C1058.2 U1010.1
NetC1066_2: C1066.2 R1034.1 U1006.4 | length 4.6
  Top Layer w0.508: R1034.1 C1066.2 ; U1006.4 R1034.1@83.979,22.112
NetC1067_2: C1067.2 R1035.2 U1006.5 | length 4.6
  Top Layer w0.508: C1067.2 82.511,22.052 R1035.2 ; U1006.5 82.079,22.029
NetR1001_1: R1001.1 R1002.2 SMA1001.1
NetR1001_2: R1001.2 R1003.2 U1004.1
NetR1005_2: R1005.2 U1002.2 | length 5.7
  Top Layer w0.254: R1005.2 62.725,21.502 62.725,18.4 63.866,17.258 U1002.2
NetR1006_2: R1006.2 R1007.1 U1001.3
NetR1007_2: R1007.2 R1008.2 SMA1002.1
NetR1009_1: R1009.1 U1001.4
NetR1025_1: R1025.1 U1006.2 | length 4.2
  Top Layer w0.254: R1025.1@83.029,11.797 U1006.2
NetR1027_1: R1027.1 R1030.2 U1010.3
NetR1027_2: R1027.2 R1031.2 SMA1003.1
NetR1034_2: R1034.2 R1035.1 R1036.2 R1037.2 | length 4.2
  Top Layer w0.508: R1036.2 R1037.2 83.842,23.75 R1034.2
NetU1001_1: U1001.1 U1004.3
RF_EN2: C1028.2 D1002.1 R1005.1 TP1002.1 | length 45.7
  Top Layer w0.254: v1(61.25,24.25) 61.25,23.407 C1028.2 R1005.1
  Top Layer w0.508: v1(44.5,9) D1002.1 TP1002.1
  S3 w0.254: v1(44.5,9) 43.75,9.75 43.75,14.924 41.5,17.174 41.5,25.5 42.5,26.5 60.5,26.5 61.25,25.75 v1(61.25,24.25)
pads on no net: R1037.1

## Polygon pours and split planes (outlines as drawn)
GND on G2 "GND_L02_P004" (solid, remove dead copper, pour order 4): 4,28 106,28 106,4 4,4
GND on Bottom Layer "GND_L04_P002" (solid, remove dead copper, pour order 2): 4,28 106,28 106,4 4,4
GND on S3 "GND_L03_P005" (solid, remove dead copper, pour order 5): 4,28 106,28 106,4 4,4
GND on Top Layer "GND_L01_P000" (solid, remove dead copper, pour order 0): 4,28 106,28 106,4 4,4

## Keep-outs
Keep-Out Layer:
  the board outline again, w0.254

## Other copper
Top Layer:
  rectangle net NetR1001_1: 7.933,15.498 10.915,16.498
  rectangle net NetR1001_2: 13.433,15.498 16.415,16.498
  region net NetR1007_2: 17.09,11.542 14.938,11.542 14.938,10.542 17.09,10.542
  region net NetR1006_2: 22.09,11.542 18.216,11.542 18.216,10.542 22.09,10.542
  region net NetC1055_2: 36.123,16.517 32.25,16.517 32.25,15.517 36.123,15.517
  region net NetC1056_1: 43.077,16.522 39.396,16.522 39.396,15.522 43.077,15.522
  rectangle net NetR1009_1: 26.885,10.625 30.5,11.625
  rectangle net NetU1001_1: 19.269,15.491 22.25,16.491
  region net NetC1001_1: 60.434,17.156 56.5,17.156 56.5,16.156 60.434,16.156
  rectangle net NetC1055_1: 27.519,15.5 30.5,16.5
  region net NetR1007_2: 14.5,11.5 14.5,7.75 15.5,7.75 15.5,11.5
  region net NetR1027_1: 97.413,16.462 94.183,16.462 94.183,15.462 97.413,15.462
  rectangle net NetR1027_2: 99.213,15.45 103,16.45
  region net NetC1058_2: 91.25,16.5 89.245,16.5 89.245,15.5 91.25,15.5
  region net NetC1058_1: 87.84,16.472 83.979,16.472 83.979,15.472 87.84,15.472
  rectangle net NetC1057_2: 78.067,15.45 81.98,16.45
  rectangle net NetC92_2: 73.188,15.45 76.11,16.45
  pour cut-out: 24.5,9.5 24.5,12.5 15,12.5 15,9.5
  pour cut-out: 4.173,17.75 4.173,14.25 48.65,14.25 50.238,15.838 50.238,16.539 48.645,17.75
  region net NetC1026_2: 65.217,16.425 65.217,16.8 63.965,16.8 62.75,17.25 62.25,17.25 62,17.25 62,16 62.75,16 63.982,16.425
  region net NetC91_1: 44.533,16.5 44.533,15.5 46.636,15.5 48,15.5 48,16.5 46.525,16.5
  pour cut-out: 13.5,4.25 16.5,4.25 16.5,9.75 13.5,9.75
  pour cut-out: 54.429,16.794 54.429,16.321 55.75,15 62.285,15 62.836,15.552 62.836,17.353 61.939,18.25 55.607,18.25
  region net NetC1027_1: 68.016,16.14 68.016,15.784 69.921,15.784 70.606,15.454 71.735,15.454 71.735,16.454 70.606,16.454 69.895,16.14
  pour cut-out: 69.188,16.663 69.188,15.163 70.102,14.25 105.5,14.25 105.5,17.475 70,17.475
  pour cut-out: 84.852,21.334 84.852,17.273 84.573,16.993 84.449,17.117 81.042,17.117 81.195,17.27 81.169,17.295 81.169,21.308 81.195,21.334

## Silkscreen, mask and mechanical layers (free items; w line width, h text height)
Top Overlay:
  circle w0.127: c106.25,3.789 r1.8
  circle w0.127: c106.211,28.25 r1.8
  circle w0.127: c3.75,3.75 r1.8
  circle w0.127: c3.75,28.211 r1.8
  lines w0.254: 0,24.461 3.75,24.461 ccw(c3.75,28.211) 7.5,28.211 7.5,31.922 ; 0.039,7.5 3.75,7.5 cw(c3.75,3.75) 7.5,3.75 7.5,0 ; 102.461,32 102.461,28.25 ccw(c106.211,28.25) 106.211,24.5 109.922,24.5 ; 102.5,0.078 102.5,3.789 cw(c106.25,3.789) 106.25,7.539 110,7.539 ; 0,0 110,0 110,32 0,32 0,0
  text "RFIN" at 5.473,20.034 h1
  text "RFOUT" at 101.825,19.725 h1
  text "射频输入" at -25.75,15.5 h3.81
  text "射频输出" at 122,14.75 h3.81
  text "RF_EN" at 44.227,-11.336 h3.81 r270
  text "+5V" at 32.044,-11.586 h3.81 r270
  text "输入耦合" at 13.75,-11.75 h3.81 r270
  text "BA70Q_C" at 56.227,-11.836 h3.81 r270
Top Solder:
  region: 57,19.767 57,18.25 62.101,18.25 62.101,19.767
  region: 5.25,19.25 5.25,17.75 34.75,17.75 34.75,19.25
  region: 43.75,19.176 43.75,17.75 47.75,17.75 47.75,19.176
  region: 70.75,19.168 70.75,17.492 80.5,17.492 80.5,19.168
  region: 105,17.467 105,19.168 85,19.168 85,17.467
  region: 68.016,16.14 68.016,15.784 69.921,15.784 70.606,15.454 71.735,15.454 71.735,16.454 70.606,16.454 69.895,16.14
Bottom Solder:
  region: 4,21 11,28 99,28 106,21 106,11 99,4 11,4 4,11
Drill Drawing:
  text "'.Legend'" at 30.5,15 h1.52

## Dimensions
110,32 to 110,0 on Top Overlay
0,32 to 110,32 on Top Overlay